# Altium PCB PCB.PcbDoc
Units mil, origin at the board's own origin, x right, y up, seen from the top; angles counter-clockwise.
Board outline 3246.78 x 2886.78 mil, 2 copper layers (Top Layer, Bottom Layer); 48 components, 38 nets, 169 pads, 30 vias.
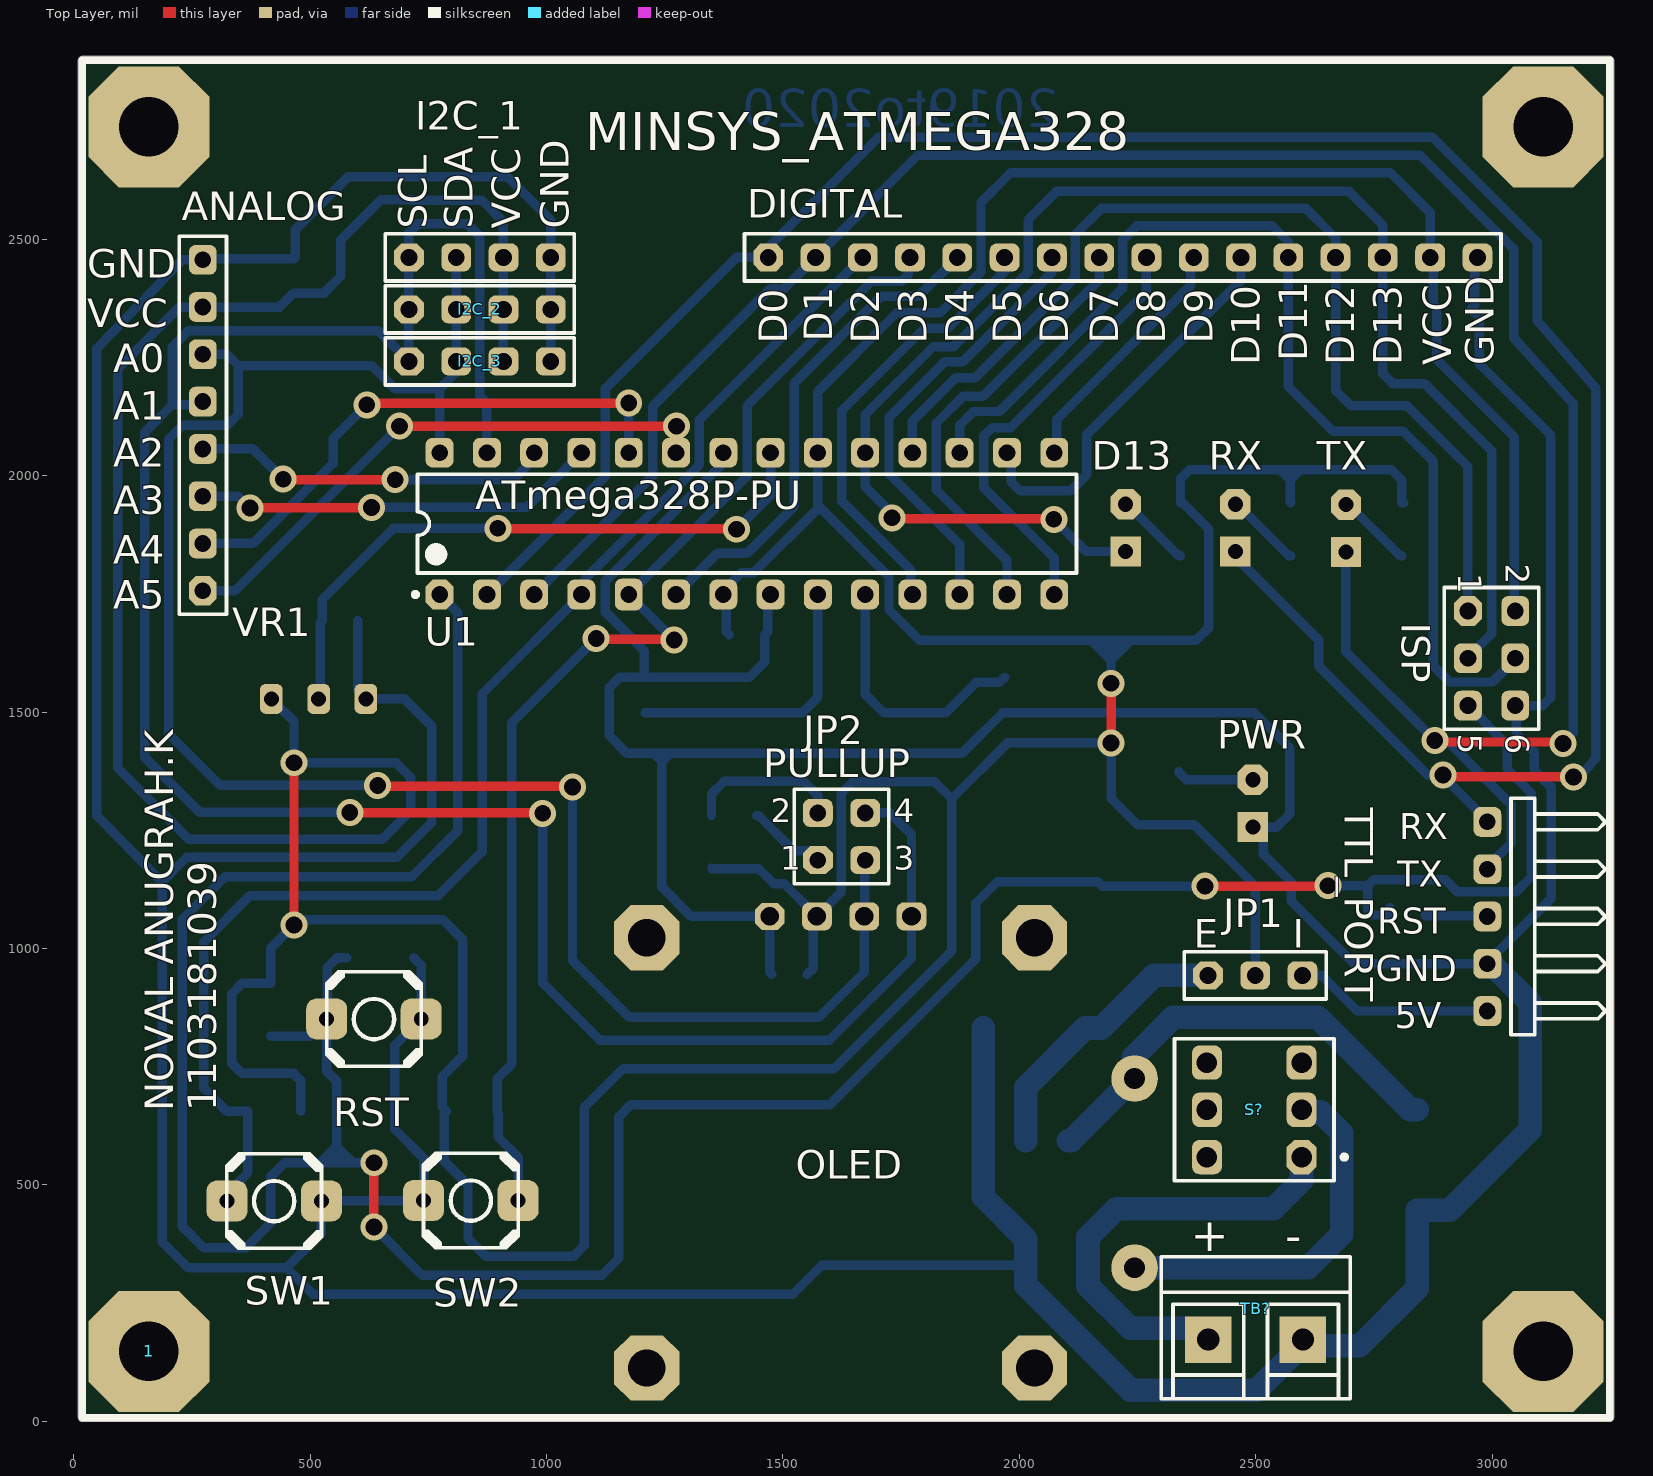
[diagram p0: Top Layer view]
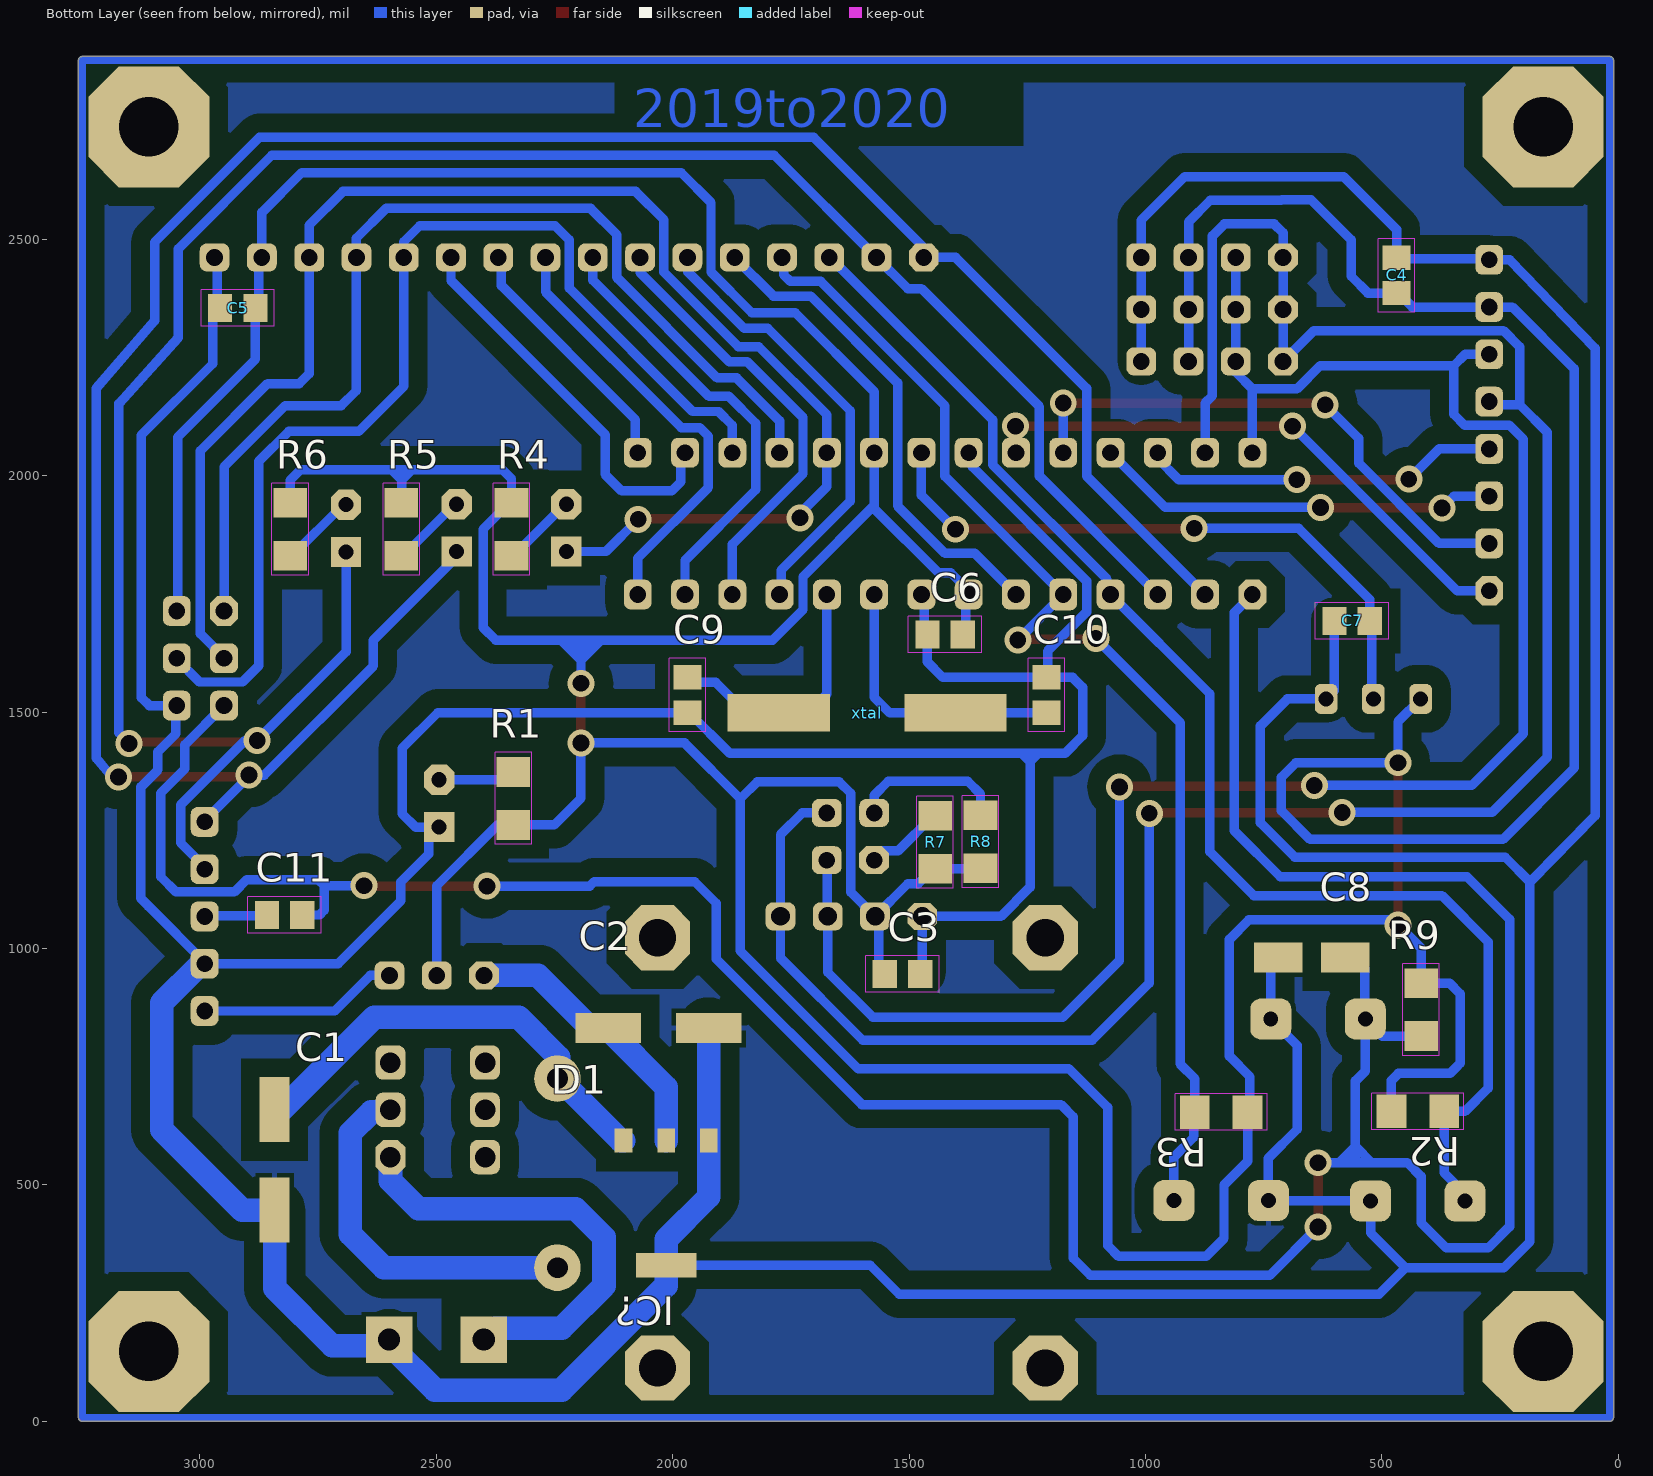
[diagram p1: Bottom Layer view, seen from below]
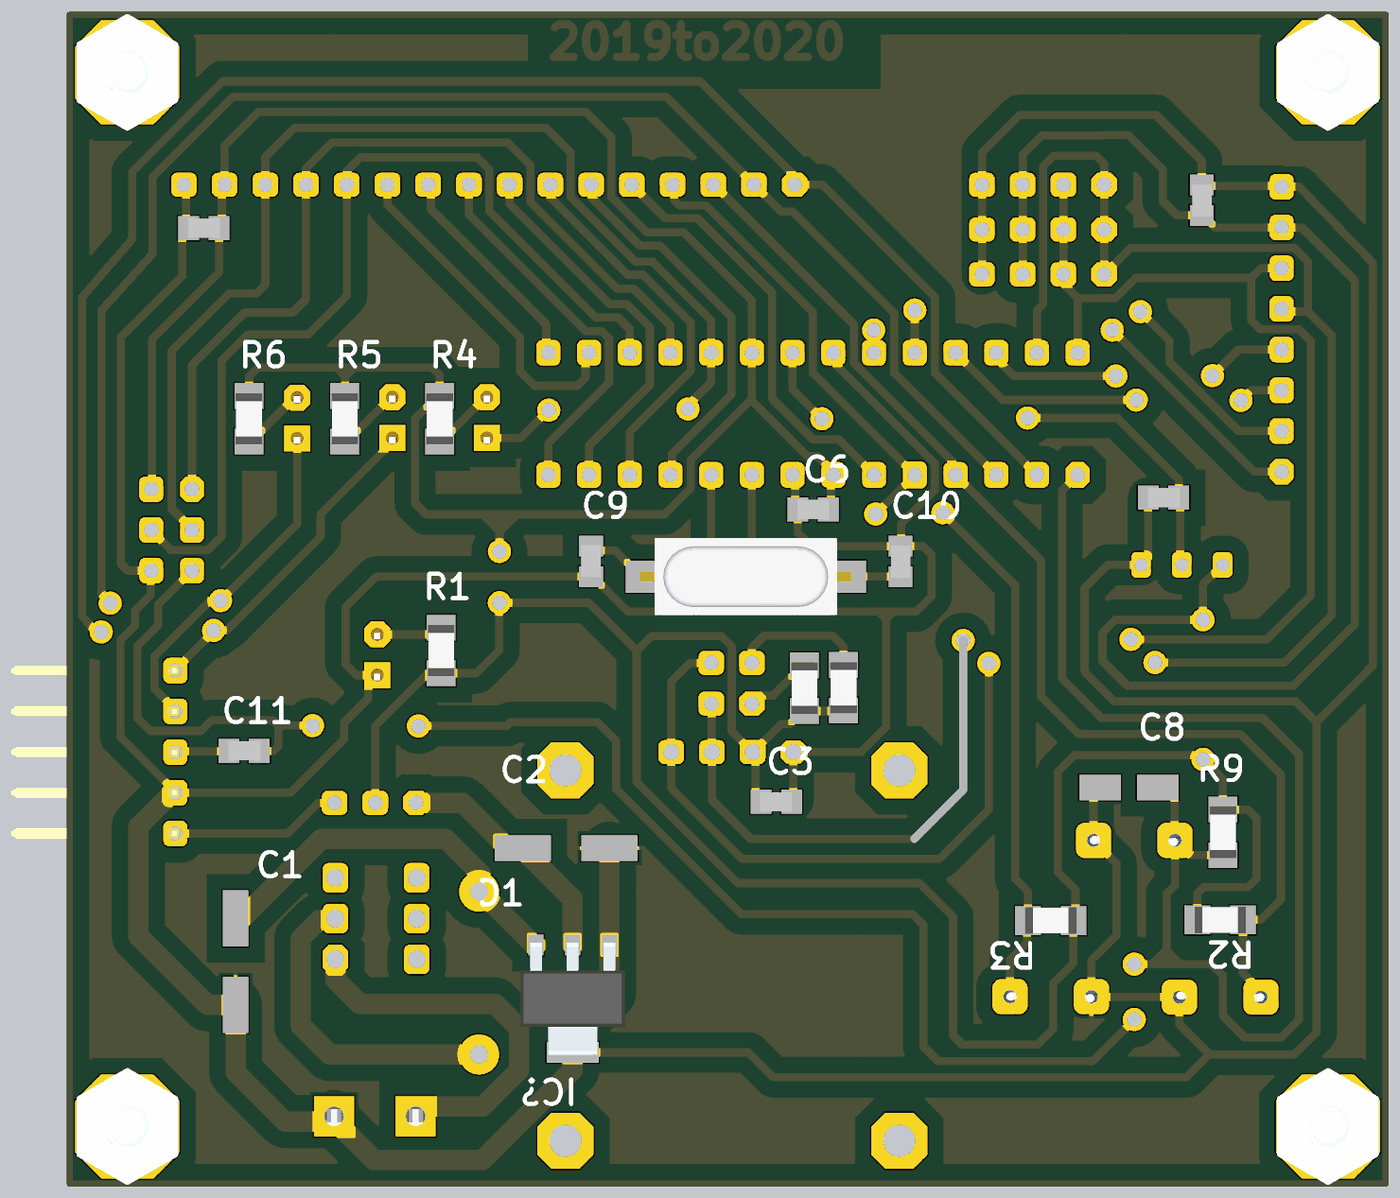
[diagram p2: 3D render of the assembled board from below, using the file's embedded part models]

## Layer stack, top to bottom
Top Solder: solder mask 0.4, Solder Resist, Dk 3.5
Top Layer: signal copper 1.4
Dielectric 1: dielectric 12.6, FR-4, Dk 4.8
Bottom Layer: signal copper 1.4
Bottom Solder: solder mask 0.4, Solder Resist, Dk 3.5

## Board outline
10.11,8 10.11,2879 cw(c18,2879) 18,2886.89 3249,2886.89 cw(c3249,2879) 3256.89,2879 3256.89,8 cw(c3249,8) 3249,0.11 18,0.11 cw(c18,8)

## Design rules (kind name [scope] priority, off if disabled: settings)
Clearance Clearance_Polygon [InPolygon] p1: gap=40 ignorepadtopadclearanceinfootprint=TRUE
Clearance [All] p2: gap=3.94 ignorepadtopadclearanceinfootprint=TRUE
PolygonConnect [All] p1: connectstyle=Relief reliefconductorwidth=10 reliefentries=4 polygonreliefangle="90 Angle" airgapwidth=10
RoutingVias [All] p1: holewidth=28 width=50 viastyle="Through Hole" minholewidth=35.43 minwidth=50 maxholewidth=118.11 maxwidth=50
SolderMaskExpansion [All] p1: expansion=4 istentingtop=FALSE
Width [All] p1: maxlimit=50 minlimit=10 preferedwidth=10 minimp=50.000000 maximp=50.000000 favimp=50.000000
30 further rules are at their usual default settings.

## Classes and differential pairs
component class SCH: ANALOG C1 C2 C3 C4 C5 C6 C7 C8 C9 C10 C11 D1 D13 DIGITAL I2C_1 I2C_2 I2C_3 IC? ISP JP1 JP2 OLED pwr R1 R2 R3 R4 R5 R6 R7 R8 R9 RST RX S? SW1 SW2 TB?

## Components (designator, comment, footprint, x,y, rotation, side; value= is the part's Value field where it differs from the comment)
1 "Spacer" SPACER 159,148 r90 top
ANALOG "Header 8" HDR1X8 273.02,1756.89 r90 top
C1 "100uF" 153CLV-0605 2842,553 r90 bottom
C2 "100uF" 153CLV-0605 2030,832 r0 bottom
C3 "100nF" C0805 1514,946 r180 bottom
C4 "100nF" C0805 469,2423.89 r90 bottom
C5 "100nF" C0805 2920,2354.89 r0 bottom
C6 "100nF" C0805 1424,1663.89 r0 bottom
C7 "100nF" C0805 563,1693 r0 bottom
C8 "10uF" 153CLV-0405 648,981 r180 bottom
C9 "22pF" C0805 1969,1536.29 r270 bottom
C10 "22pF" C0805 1209,1536.29 r90 bottom
C11 "100nF" C0805 2821,1071 r0 bottom
D1 "DIODEgeneral purpose rectifier, 1 A" DO41-10 2244,525 r270 bottom
D13 "LEDOSRAM:- CHIPLEDLG R971, LG N971, LY N971, LG Q971, LY Q971, LO R971, LY R971 LH N974, LH R974LS Q976, LO Q976, LY Q976LO Q996- Hyper CHIPLEDLW Q18SLB Q993, LB Q99A, LB R99A- SideLEDLS A670, LO A670, LY A670, LG A670, LP A670LB A673, LV A673, LT A673, LW A673LH A674LY A675LS A676, LA A676, LO A676, LY A676, LW A676LS A679, LY A679, LG A679-  Hyper Micro SIDELEDÂ®LS Y876, LA Y876, LO Y876, LY Y876LT Y87S- SmartLEDLW L88C, LW L88SLB L89C, LB L89S, LG L890LS L89K, LO L89K, LY L89KLS L896, LA L896, LO L896, LY L896- TOPLEDLS T670, LO T670, LY T670, LG T670, LP T670LSG T670, LSP T670, LSY T670, LOP T670, LYG T670LG T671, LOG T671, LSG T671LB T673, LV T673, LT T673, LW T673LH T674LS T676, LA T676, LO T676, LY T676, LB T676, LH T676, LSB T676, LW T676LB T67C, LV T67C, LT T67C, LS T67K, LO T67K, LY T67K, LW E67CLS E67B, LA E67B, LO E67B, LY E67B, LB E67C, LV E67C, LT E67CLW T67CLS T679, LY T679, LG T679LS T770, LO T770, LY T770, LG T770, LP T770LB T773, LV T773, LT T773, LW T773LH T774LS E675, LA E675, LY E675, LS T675LS T776, LA T776, LO T776, LY T776, LB T776LHGB T686LT T68C, LB T68C- Hyper Mini TOPLEDÂ®LB M676- Mini TOPLED SantanaÂ®LG M470LS M47K, LO M47K, LY M47KSource: http://www.osram.convergy.de/" LED3MM 2225,1889.89 r270 top
DIGITAL "Header 16" HDR1X16 1469,2461.89 r0 top
I2C_1 "Header 4" HDR1X4 709,2461.89 r0 top
I2C_2 "Header 4" HDR1X4 709,2351.89 r0 top
I2C_3 "Header 4" HDR1X4 709,2241.89 r0 top
IC? "AMS1117 5V" SOT229P700X180-4N 2014,462 r270 bottom
ISP "Header 3X2" HDR2X3 2949,1713.89 r270 top
JP1 "Header 3" HDR1X3 2399,943.3 r0 top
JP2 "PULLUP" HDR2X2 1574,1187 r0 top
OLED "128x64 Dot Matrix OLED Module based on SSD1306 chipVariant with I2C interfaceMore details available here:http://www.instructables.com/id/Monochrome-096-i2c-OLED-display-with-arduino-SSD13/SSD1306 datasheet:https://cdn-shop.adafruit.com/datasheets/SSD1306.pdfClick here to find device on ebay.comNote: There are two variants: I2C and SPI. Search for the proper version." DISPLAY-OLED-128X64-I2C 1622,568 r0 top
PWR "LEDOSRAM:- CHIPLEDLG R971, LG N971, LY N971, LG Q971, LY Q971, LO R971, LY R971 LH N974, LH R974LS Q976, LO Q976, LY Q976LO Q996- Hyper CHIPLEDLW Q18SLB Q993, LB Q99A, LB R99A- SideLEDLS A670, LO A670, LY A670, LG A670, LP A670LB A673, LV A673, LT A673, LW A673LH A674LY A675LS A676, LA A676, LO A676, LY A676, LW A676LS A679, LY A679, LG A679-  Hyper Micro SIDELEDÂ®LS Y876, LA Y876, LO Y876, LY Y876LT Y87S- SmartLEDLW L88C, LW L88SLB L89C, LB L89S, LG L890LS L89K, LO L89K, LY L89KLS L896, LA L896, LO L896, LY L896- TOPLEDLS T670, LO T670, LY T670, LG T670, LP T670LSG T670, LSP T670, LSY T670, LOP T670, LYG T670LG T671, LOG T671, LSG T671LB T673, LV T673, LT T673, LW T673LH T674LS T676, LA T676, LO T676, LY T676, LB T676, LH T676, LSB T676, LW T676LB T67C, LV T67C, LT T67C, LS T67K, LO T67K, LY T67K, LW E67CLS E67B, LA E67B, LO E67B, LY E67B, LB E67C, LV E67C, LT E67CLW T67CLS T679, LY T679, LG T679LS T770, LO T770, LY T770, LG T770, LP T770LB T773, LV T773, LT T773, LW T773LH T774LS E675, LA E675, LY E675, LS T675LS T776, LA T776, LO T776, LY T776, LB T776LHGB T686LT T68C, LB T68C- Hyper Mini TOPLEDÂ®LB M676- Mini TOPLED SantanaÂ®LG M470LS M47K, LO M47K, LY M47KSource: http://www.osram.convergy.de/" LED3MM 2494,1307 r270 top
R1 "331" R1206 2337,1317.57 r90 bottom
R2 "10K" R1206 424,655.7 r0 bottom
R3 "10K" R1206 840,654 r180 bottom
R4 "331" R1206 2341,1886.89 r90 bottom
R5 "1K" R1206 2574,1886.89 r90 bottom
R6 "1K" R1206 2809,1886.89 r90 bottom
R7 "10K" R1206 1445,1224.89 r270 bottom
R8 "10K" R1206 1349,1226 r270 bottom
R9 "10K" R1206 417,870.89 r90 bottom
RST "But 2Pin" PB-2Pin 635,851 r0 top
RX "LEDOSRAM:- CHIPLEDLG R971, LG N971, LY N971, LG Q971, LY Q971, LO R971, LY R971 LH N974, LH R974LS Q976, LO Q976, LY Q976LO Q996- Hyper CHIPLEDLW Q18SLB Q993, LB Q99A, LB R99A- SideLEDLS A670, LO A670, LY A670, LG A670, LP A670LB A673, LV A673, LT A673, LW A673LH A674LY A675LS A676, LA A676, LO A676, LY A676, LW A676LS A679, LY A679, LG A679-  Hyper Micro SIDELEDÂ®LS Y876, LA Y876, LO Y876, LY Y876LT Y87S- SmartLEDLW L88C, LW L88SLB L89C, LB L89S, LG L890LS L89K, LO L89K, LY L89KLS L896, LA L896, LO L896, LY L896- TOPLEDLS T670, LO T670, LY T670, LG T670, LP T670LSG T670, LSP T670, LSY T670, LOP T670, LYG T670LG T671, LOG T671, LSG T671LB T673, LV T673, LT T673, LW T673LH T674LS T676, LA T676, LO T676, LY T676, LB T676, LH T676, LSB T676, LW T676LB T67C, LV T67C, LT T67C, LS T67K, LO T67K, LY T67K, LW E67CLS E67B, LA E67B, LO E67B, LY E67B, LB E67C, LV E67C, LT E67CLW T67CLS T679, LY T679, LG T679LS T770, LO T770, LY T770, LG T770, LP T770LB T773, LV T773, LT T773, LW T773LH T774LS E675, LA E675, LY E675, LS T675LS T776, LA T776, LO T776, LY T776, LB T776LHGB T686LT T68C, LB T68C- Hyper Mini TOPLEDÂ®LB M676- Mini TOPLED SantanaÂ®LG M470LS M47K, LO M47K, LY M47KSource: http://www.osram.convergy.de/" LED3MM 2457,1889.89 r270 top
S? "SW-DPDT" DPDT-6 2497,659 r180 top
SW1 "But 2Pin" PB-2Pin 424,465.89 r180 top
SW2 "But 2Pin" PB-2Pin 840,467 r0 top
TB? "T-Blok 2Pin" TB-2P 2500,173 r0 top
TTL_PORT "Header 5H" HDR1X5H 2990,868 r90 top
TX "LEDOSRAM:- CHIPLEDLG R971, LG N971, LY N971, LG Q971, LY Q971, LO R971, LY R971 LH N974, LH R974LS Q976, LO Q976, LY Q976LO Q996- Hyper CHIPLEDLW Q18SLB Q993, LB Q99A, LB R99A- SideLEDLS A670, LO A670, LY A670, LG A670, LP A670LB A673, LV A673, LT A673, LW A673LH A674LY A675LS A676, LA A676, LO A676, LY A676, LW A676LS A679, LY A679, LG A679-  Hyper Micro SIDELEDÂ®LS Y876, LA Y876, LO Y876, LY Y876LT Y87S- SmartLEDLW L88C, LW L88SLB L89C, LB L89S, LG L890LS L89K, LO L89K, LY L89KLS L896, LA L896, LO L896, LY L896- TOPLEDLS T670, LO T670, LY T670, LG T670, LP T670LSG T670, LSP T670, LSY T670, LOP T670, LYG T670LG T671, LOG T671, LSG T671LB T673, LV T673, LT T673, LW T673LH T674LS T676, LA T676, LO T676, LY T676, LB T676, LH T676, LSB T676, LW T676LB T67C, LV T67C, LT T67C, LS T67K, LO T67K, LY T67K, LW E67CLS E67B, LA E67B, LO E67B, LY E67B, LB E67C, LV E67C, LT E67CLW T67CLS T679, LY T679, LG T679LS T770, LO T770, LY T770, LG T770, LP T770LB T773, LV T773, LT T773, LW T773LH T774LS E675, LA E675, LY E675, LS T675LS T776, LA T776, LO T776, LY T776, LB T776LHGB T686LT T68C, LB T68C- Hyper Mini TOPLEDÂ®LB M676- Mini TOPLED SantanaÂ®LG M470LS M47K, LO M47K, LY M47KSource: http://www.osram.convergy.de/" LED3MM 2691,1888.89 r270 top
U1 "ATmega328P-PU" 28P3 1424,1898.89 r90 top
VR1 "10K" S64W 518,1478 r0 top
xtal "16MHz" 9C7680MBBKT 1589,1498.89 r180 bottom
? "Spacer" SPACER 159,2738 r90 top
? "Spacer" SPACER 3108,2738 r90 top
? "Spacer" SPACER 3108,148 r90 top

## Footprints (in the part's own frame and the unit in brackets; to place one, negate y for a bottom-side part, rotate by r counter-clockwise, add the part's x,y. Pads: shape width x height; smd on the part's side, far side on the other; paste and mask are expansions set on the pad)
9C7680MBBKT [mm]
  rect 5.5x2 smd: 1(-4.75,0) 2(4.75,0)
  body extent -6.6,-2.4 6.6,2.4, height 4.3
28P3 [mm] "DIP, 28-Leads, Row Spacing 7.62mm, Pitch 2.54mm, Body 34.67x7.3mm"
  oct 1.6x1.5 hole 0.9: 1(-3.81,16.51)
  rrect50% 1.6x1.5 hole 0.9: 2(-3.81,13.97) 3(-3.81,11.43) 4(-3.81,8.89) 6(-3.81,3.81) 7(-3.81,1.27) 8(-3.81,-1.27) 9(-3.81,-3.81) 10(-3.81,-6.35) 11(-3.81,-8.89) 12(-3.81,-11.43) 13(-3.81,-13.97) 14(-3.81,-16.51) 15(3.81,-16.51) 16(3.81,-13.97) 17(3.81,-11.43) 18(3.81,-8.89) 19(3.81,-6.35) 20(3.81,-3.81) 21(3.81,-1.27) 22(3.81,1.27) 23(3.81,3.81) 24(3.81,6.35) 25(3.81,8.89) 26(3.81,11.43) 27(3.81,13.97) 28(3.81,16.51)
  rrect50% 1.7x1.5 hole 0.9: 5(-3.81,6.35)
  silkscreen extent -3.93,-17.7 2.65,17.93, body extent -3.6,-17.65 3.6,17.65, height 4.58
153CLV-0405 [mil]
  rect 102.36x62.99 smd: +(70.87,0) -(-70.87,0)
153CLV-0605 [mm]
  rect 3.5x1.6 smd: +(2.7,0) -(-2.7,0)
C0805 [mil]
  rect 51.18x59.06 smd: 1(-37.4,0) 2(37.4,0)
  Top Layer keep-out lines w2: 77.68,-38.7 -77.68,-38.7 -77.68,38.7 77.68,38.7 77.68,-38.7
  body extent -40,-25 39,24, height 49
DISPLAY-OLED-128X64-I2C [mm]
  oct 1.6x1.452 hole 1: 1(-3.81,12.7)
  rrect50% 1.6x1.5 hole 1: 2(-1.27,12.7) 3(1.27,12.7) 4(3.81,12.7)
  oct 3.5x3.5 hole 2 unplated: MH1(-10.414,11.557) MH2(10.414,11.557) MH3(10.414,-11.557) MH4(-10.414,-11.557)
DO41-10 [mm]
  round 2.5 hole 1.118: A(5.08,0) C(-5.08,0)
DPDT-6 [mm] "Switch; 6 Leads"
  oct 1.6x1.85 hole 1.1: 1(-2.54,2.54)
  rrect50% 1.6x1.85 hole 1.1: 2(-2.54,0) 3(-2.54,-2.54) 4(2.54,-2.54) 5(2.54,0) 6(2.54,2.54)
  silkscreen extent -4.96,-3.81 4.28,3.81
HDR1X3 [mm] "Connector; Header; 3 Position"
  oct 1.6x1.5 hole 0.9: 1(0,0)
  rrect50% 1.6x1.5 hole 0.9: 2(2.54,0) 3(5.08,0)
  silkscreen extent -1.27,-1.27 6.35,1.27
HDR1X4 [mm] "Connector; Header; 4 Position"
  oct 1.6x1.5 hole 0.9: 1(0,0)
  rrect50% 1.6x1.5 hole 0.9: 2(2.54,0) 3(5.08,0) 4(7.62,0)
  silkscreen extent -1.27,-1.27 8.89,1.27
HDR1X5H [mm] "Connector; Header; 5 Position; Right Angle"
  rrect50% 1.6x1.5 hole 0.9: 1(0,0) 2(2.54,0) 3(5.08,0) 4(7.62,0) 5(10.16,0)
  silkscreen extent -1.27,-6.35 11.43,-1.27, body extent -1.27,-10.23 11.43,0.25, height 3.13
HDR1X8 [mm] "Connector; Header; 8 Position"
  oct 1.6x1.5 hole 0.9: 1(0,0)
  rrect50% 1.6x1.5 hole 0.9: 2(2.54,0) 3(5.08,0) 4(7.62,0) 5(10.16,0) 6(12.7,0) 7(15.24,0) 8(17.78,0)
  silkscreen extent -1.27,-1.27 19.05,1.27
HDR1X16 [mm] "Connector; Header; 16 Position"
  oct 1.6x1.5 hole 0.9: 1(0,0)
  rrect50% 1.6x1.5 hole 0.9: 2(2.54,0) 3(5.08,0) 4(7.62,0) 5(10.16,0) 6(12.7,0) 7(15.24,0) 8(17.78,0) 9(20.32,0) 10(22.86,0) 11(25.4,0) 12(27.94,0) 13(30.48,0) 14(33.02,0) 15(35.56,0) 16(38.1,0)
  silkscreen extent -1.27,-1.27 39.37,1.27
HDR2X2 [mm] "Connector; Header; 2x2 Position"
  oct 1.6x1.5 hole 0.9: 1(0,0)
  rrect50% 1.6x1.5 hole 0.9: 2(0,2.54) 3(2.54,0) 4(2.54,2.54)
  silkscreen extent -1.27,-1.27 3.81,3.81
HDR2X3 [mm] "Connector; Header; 3x2 Position"
  oct 1.6x1.5 hole 0.9: 1(0,0)
  rrect50% 1.6x1.5 hole 0.9: 2(0,2.54) 3(2.54,0) 4(2.54,2.54) 5(5.08,0) 6(5.08,2.54)
  silkscreen extent -1.27,-1.27 6.35,3.81
LED3MM [mil]
  oct 63.9x63.9 / inner oct 60x60 / far side oct 63.9x63.9 hole 32: A(-50,0)
  rect 63.9x63.9 / inner rect 60x60 / far side rect 63.9x63.9 hole 32: K(50,0)
  body extent -70,-75 65,75, height 205
PB-2Pin [mm]
  rrect50% 2.2x2.2 hole 0.8: 1(-2.54,0) 2(2.54,0)
  silkscreen extent -2.54,-2.54 2.54,2.54, body extent -3.61,-3.56 3.64,3.48, height 4.33
R1206 [mil]
  rect 62.99x70.98 smd: 1(-55.98,0) 2(55.98,0)
  Top Layer keep-out lines w2: -97.36,-38.7 97.36,-38.7 97.36,38.7 -97.36,38.7 -97.36,-38.7
  body extent -63,-33 63,33, height 21
S64W [mil]
  rrect50% 48x62.99 hole 32: A(100,50) E(-100,50) S(0,50)
SOT229P700X180-4N [mm]
  rect 1.3x0.95 smd: 1(-3.35,2.29) 2(-3.35,0) 3(-3.35,-2.29)
  rect 1.3x3.25 smd: 4(3.35,0)
  body extent -3.5,-3.25 3.5,3.25, height 1.8
SPACER [mm]
  oct 6.5x6.5 hole 3.2: 1(0,0)
  body extent -3.65,-3.17 3.65,3.18, height 2.45
TB-2P [mm]
  rect 2.5x2.5 hole 1.2: 1(-2.54,0) 2(2.54,0)
  round 1 on Top Overlay: ""(-2.54,3.302) ""(2.54,3.302)
  silkscreen extent -5.08,-3.17 5.08,4.44, body extent -5.08,-3.14 5.08,4.36, height 10.03

## Part data
ANALOG: "Header, 8-Pin", LatestRevisionDate=17-Jul-2002, LatestRevisionNote="Re-released for DXP Platform.", Publisher="Altium Limited"
C1 C2: library part CPOL-EU153CLV-0605, Package=153CLV-0605, DeviceName=153CLV-0605, DeviceSetName=CPOL-EU, GateName_1=G$1, LibraryName=rcl, SymbolName_1=CPOL
C3 C4 C5 C6 C7 C9 C10 C11: library part C-EUC0805, Package=C0805, DeviceName=C0805, DeviceSetName=C-EU, GateName_1=G$1, LibraryName=rcl, SymbolName_1=C-EU
C8: library part CPOL-EU153CLV-0405, Package=153CLV-0405, DeviceName=153CLV-0405, DeviceSetName=CPOL-EU, GateName_1=G$1, LibraryName=rcl, SymbolName_1=CPOL
D1: library part 1N4004, Package=DO41-10, DeviceSetName=1N4004, GateName_1=1, LibraryName=diode, SymbolName_1=D
D13 PWR RX TX: library part LED3MM, DeviceName=3MM, DeviceSetName=LED, GateName_1=G$1, LibraryName=led, Package=LED3MM, SymbolName_1=LED
DIGITAL: "Header, 16-Pin", LatestRevisionDate=17-Jul-2002, LatestRevisionNote="Re-released for DXP Platform.", Publisher="Altium Limited"
I2C_1 I2C_2 I2C_3: "Header, 4-Pin", LatestRevisionDate=17-Jul-2002, LatestRevisionNote="Re-released for DXP Platform.", Publisher="Altium Limited"
IC?: library part AMS1117-3.3V, Manufacturer_Name="Advanced Monolithic Systems", Manufacturer_Part_Number=ams1117-3.3v, Package=SOT229P700X180-4N, DeviceSetName=AMS1117-3.3V, GateName_1=G$1, Height=1.8mm, LibraryName=ams1117-3.3v, SymbolName_1=AMS1117-3.3V
ISP: "Header, 3-Pin, Dual row", LatestRevisionDate=17-Jul-2002, LatestRevisionNote="Re-released for DXP Platform.", Publisher="Altium Limited"
JP1: "Header, 3-Pin", LatestRevisionDate=17-Jul-2002, LatestRevisionNote="Re-released for DXP Platform.", Publisher="Altium Limited"
JP2: library part "Header 2X2", "Header, 2-Pin, Dual row", LatestRevisionDate=17-Jul-2002, LatestRevisionNote="Re-released for DXP Platform.", Publisher="Altium Limited"
OLED: library part DISPLAY-OLED-128X64-I2C, DeviceSetName=DISPLAY-OLED-128X64-I2C, GateName_1=G$1, LibraryName=MASTER, Package=DISPLAY-OLED-128X64-I2C, SymbolName_1=DISPLAY-OLED-128X64-I2C
R1 R2 R3 R4 R5 R6 R7 R8 R9: library part R-EU_R1206, Package=R1206, DeviceName=R1206, DeviceSetName=R-EU_, GateName_1=G$1, LibraryName=rcl, SymbolName_1=R-EU
RST SW1 SW2: "Push Button 2Pin"
S?: "Double-Pole, Double-Throw Switch", LatestRevisionDate=17-Jul-2002, LatestRevisionNote="Re-released for DXP Platform.", PackageDescription="Switch; 6 Leads", PackageReference=DPDT-6, Published=24-Mar-1999, Publisher="Altium Limited"
TB?: "Terminal Blok 2Pin"
TTL_PORT: "Header, 5-Pin, Right Angle", LatestRevisionDate=17-Jul-2002, LatestRevisionNote="Re-released for DXP Platform.", Publisher="Altium Limited"
U1: "8-bit AVR Microcontroller, 32KB Flash, 1KB EEPROM, 2KB SRAM, 28-pin PDIP, Industrial Grade (-40°C to 85°C)", Supplier Part Number 1=ATMEGA328P-PU-ND, ComponentLink1Description="Manufacturer Link", ComponentLink1URL=http://www.atmel.com/products/avr/default.asp?, ComponentLink2Description="ATmega48A/48PA/88A/88PA/168A/168PA/328/328P Datasheet", ComponentLink2URL=http://www.atmel.com/dyn/resources/prod_documents/8271.pdf, ComponentLink3Description="ATmega48A/48PA/88A/88PA/168A/168PA/328/328P Summary", ComponentLink3URL=http://www.atmel.com/dyn/resources/prod_documents/8271S.pdf, ComponentLink4Description="Atmel.com Home", ComponentLink4URL=http://www.atmel.com, DatasheetVersion="revA, Jan-2010", PackageDescription="28-lead (0.300\"/7.62mm Wide) Plastic Dual Inline Package (PDIP)", PackageReference=28P3, PackageVersion="revB, Sep-2001", Published=1-Apr-2010, Publisher="Altium Limited", Supplier 1=Digi-Key, Supplier 2=Farnell, Supplier 3=Mouser, Supplier Part Number 2=1715487, Supplier Part Number 3=556-ATMEGA328P-PU
VR1: library part TRIM_EU-S64W, Package=S64W, DeviceName=S64W, DeviceSetName=TRIM_EU-, GateName_1=1, LibraryName=pot, SymbolName_1=TPOT
xtal: library part 9C-8.000MEEJ-T, Manufacturer_Name=TXC, Package=9C7680MBBKT, DeviceSetName=9C-8.000MEEJ-T, GateName_1=G$1, Height=3.8mm, LibraryName=9C-8.000MEEJ-T, Manufacturer_Part_Number=9C-8.000MEEJ-T, Mouser_Part_Number=717-9C-8.000MEEJ-T, Mouser_Price-Stock=https://www.mouser.com/Search/Refine.aspx?Keyword=717-9C-8.000MEEJ-T, SymbolName_1=9C-8.000MEEJ-T

## Via types
v1: diameter 57, hole 35.43, Top Layer to Bottom Layer, 30 vias

## Nets (pads, with @x,y where several pads share a name; then routed paths per layer and width w, separated by ;. In a path a pad name is that pad's centre, name@x,y a point inside that pad or via, vN(x,y) a via of type N, cw(c..) or ccw(c..) an arc to the next point about the centre after c; other vN are vias at no path point)
+5: JP1.3 TTL_PORT.1 | length 422.2
  Bottom Layer w20: JP1.3 2639.7,943.3 2715,868 TTL_PORT.1
GND: ANALOG.8 C1.- C2.- C3.2 C4.2 C5.2 C6.2 C7.2 C8.- C9.2 C10.2 DIGITAL.16 I2C_1.4 I2C_2.4 I2C_3.4 IC?.1 IC?.4 ISP.6 OLED.1 PWR.K RST.2 SW1.1 SW2.1 TB?.2 TTL_PORT.2 U1.8 U1.22 VR1.A | length 15925
  Bottom Layer w10: IC?.4@1988.44,330.11 2013.41,330.11 IC?.4 ; TTL_PORT.2@2987.89,968.89 2989.11,968.89 TTL_PORT.2
  Bottom Layer w20: ANALOG.8 229.89,2456.89 49,2270 49,1281 187,1141 ; ANALOG.8@275,2456.89 277.2,2459.09 466.8,2459.09 C4.2 469,2520.89 581,2632.89 917,2632.89 1009,2540.89 I2C_1.4 I2C_2.4 I2C_3.4 ; C7.2 600.4,1545.6 VR1.A 700,1528 757,1471 757,1266 684,1193 239,1193 187,1141 ; C8.- 735,964.87 RST.2 679,795 679,618 740,557 SW2.1 739.44,466.44 524.56,466.44 SW1.1 524,399 450,325 ; U1.22 1366.53,2041.42 1366.53,2019.53 1124.47,1777.47 1124.47,1711.84 1207.03,1629.28 1207.03,1575.66 C10.2 ; U1.8 1467.7,1742.59 1467.7,1670.19 C6.2 1462,1663.29 1462,1607 1428.69,1573.69 C10.2 ; C3.2 1472,950.6 OLED.1 1306,1068 1244,1130 1244,1395.59 ; IC?.4@1988.44,330.11 1582.11,330.11 1520.9,268.9 506.1,268.9 450,325 ; DIGITAL.16 2963.2,2456.09 2963.2,2360.69 C5.2 2957.4,2350.95 2972.99,2335.36 2972.99,2237.01 3124,2086 3124,1530.89 3107,1513.89 ISP.6 3050.95,1511.93 3050.95,1454.36 3089,1416.32 3089,1378 3125,1342 3125,1106 3109,1090 TTL_PORT.2@2987.89,968.89 ; TTL_PORT.2 2707.88,968 2575.13,1100.75 2575.13,1140.83 2515.95,1200.01 2515.95,1235.05 PWR.K 2544,1257 2572,1285 2572,1424 2497.11,1498.89 C9.2 1965.06,1498.89 1879.76,1413.59 1262,1413.59 1244,1395.59 ; 187,1141 187,380 242,325 450,325 ; C10.2 1154.24,1573.69 1133,1552.45 1133,1450 1169.41,1413.59 1226,1413.59 1244,1395.59
  Bottom Layer w50: C2.- 1923.77,831.93 1923.77,593.96 IC?.1 1923.84,475.16 2014,385 2014,330.7 IC?.4@2013.41,330.11 ; IC?.4 2014,287 2235,66 2503,66 2597,160 TB?.2@2613,160 ; TB?.2 TB?.2@2613,160 ; TTL_PORT.2@2991.73,964.71 3001.29,964.71 3081,885 3081,617 2910.7,446.7 C1.- 2842,281.79 2720.21,160 TB?.2@2613,160
NetANALOG_1: ANALOG.1 U1.23 | length 1210
  Top Layer w20: v1(689,2104.89) v1(1275,2104.89)
  Bottom Layer w20: ANALOG.1 341,1756.89 v1(689,2104.89) ; U1.23 1284,2058.89 1275,2067.89 v1(1275,2104.89)
NetANALOG_2: ANALOG.2 U1.24 | length 1157.5
  Top Layer w20: v1(620,2150) 623.89,2153.89 v1(1174,2153.89)
  Bottom Layer w20: ANALOG.2@275,1856.89 378.89,1856.89 549,2027 549,2079 v1(620,2150) ; U1.24 v1(1174,2153.89)
NetANALOG_3: ANALOG.3 U1.25 | length 859.7
  Top Layer w20: v1(373,1932) 629,1932 v1(630,1933)
  Bottom Layer w20: ANALOG.3 348.11,1956.89 v1(373,1932) ; v1(630,1933) 958.11,1933 U1.25
NetANALOG_4: ANALOG.4 U1.26 | length 759.1
  Top Layer w20: v1(443,1992.89) 444,1991.89 v1(680,1991.89)
  Bottom Layer w20: ANALOG.4 379,2056.89 v1(443,1992.89) ; v1(680,1991.89) 930,1991.89 974,2035.89 U1.26
NetANALOG_5: ANALOG.5 I2C_1.1 I2C_2.1 I2C_3.1 JP2.4 OLED.4 U1.27 | length 4936.1
  Top Layer w20: v1(584,1288) 585,1287 991,1287 v1(992,1286)
  Bottom Layer w20: ANALOG.5 266.51,2150.38 208.49,2150.38 ; v1(584,1288) 267,1288 150,1405 150,2091.89 208.49,2150.38 ; U1.27 874,2153.85 858.53,2169.32 858.53,2507.36 833,2532.89 728,2532.89 709,2513.89 I2C_1.1 I2C_2.1 I2C_3.1 643.89,2307 243,2307 208.49,2272.49 208.49,2150.38 ; v1(992,1286) 992,927 1113,806 1598,806 1772,980 OLED.4 1772,1241 1726,1287 JP2.4
NetANALOG_6: ANALOG.6 I2C_1.2 I2C_2.2 I2C_3.2 JP2.3 OLED.3 U1.28 | length 4065.4
  Top Layer w20: v1(643,1345) 644.5,1343.5 1053.5,1343.5 v1(1055,1342)
  Bottom Layer w20: ANALOG.6 324,2256.89 348,2232.89 ; v1(643,1345) 310,1345 201,1454 201,2077.56 230.44,2107 325,2107 348,2130 348,2232.89 ; U1.28 774,2183.89 ; I2C_1.2 I2C_2.2 I2C_3.2 809,2218.89 774,2183.89 ; v1(1055,1342) 1055,974.62 1174.67,854.95 1576.95,854.95 1672,950 OLED.3 1673,1069 1673,1186 JP2.3 ; 348,2232.89 630.66,2232.89 679.66,2183.89 774,2183.89
NetC1_+: C1.+ D1.C IC?.3 | length 953.4
  Bottom Layer w50: IC?.3 2109.87,593.89 2240.98,725 2240.98,769.98 2326,855 2631,855 2826.7,659.3 C1.+
NetC2_+: C2.+ IC?.2 JP1.1 | length 595.8
  Bottom Layer w50: IC?.2 2014,706.63 2139.37,832 2173.7,832 2285,943.3 JP1.1
NetC7_1: C7.1 U1.21 VR1.S | length 1344.9
  Top Layer w20: v1(897,1888.89) 898,1887.89 1401,1887.89 v1(1402,1886.89)
  Bottom Layer w20: VR1.S 521.8,1531.8 521.8,1689.2 C7.1 525.6,1738.38 676.11,1888.89 v1(897,1888.89) ; v1(1402,1886.89) 1474,1958.89 U1.21
NetC8_+: C8.+ C11.1 ISP.5 R9.1 RST.1 U1.1 | length 6771.8
  Top Layer w20: v1(635,411) v1(635,547) ; v1(2393,1132) 2652,1132 v1(2653,1133)
  Bottom Layer w20: R9.1 498.91,814.91 RST.1 ; C8.+ 557.45,981 535.95,959.5 535.95,857.95 538.95,854.95 RST.1 ; v1@634,554.03 v1@638.02,550.02 ; v1(635,411) 737,309 1117,309 1153,345 1153,644 1179,670 1600,670 1908,978 1908,1096 1953.27,1141.27 2166.41,1141.27 2175.68,1132 v1(2393,1132) ; v1(635,547) 590.43,547 556,581.43 ; U1.1 812,1710.89 812,1249 715,1152 320,1152 230,1062 230,412 275,367 364,367 417,420 417,518 446,547 521.57,547 556,581.43 ; v1(2653,1133) 2737,1133 ; C11.1@2783.6,1086.4 C11.1 2747.31,1071 2737,1081.31 2737,1133 ; ISP.5 3032,1430.89 3032,1380 3083,1329 3083,1152.05 3050.95,1120 2927,1120 2901,1146 2750,1146 2737,1133 ; RST.1 535,741 556,720 556,581.43
NetC9_1: C9.1 U1.10 xtal.1 | length 552.9
  Bottom Layer w20: U1.10 1674,1538.26 1713.37,1498.89 1844.91,1498.89 1909.47,1563.45 1958.76,1563.45 C9.1
NetC10_1: C10.1 U1.9 xtal.2 | length 595.9
  Bottom Layer w20: C10.1 xtal.2 1541.32,1498.89 1574,1531.57 U1.9
NetC11_2: C11.2 TTL_PORT.3 | length 132.8
  Bottom Layer w20: C11.2 2859.9,1069.5 2988.5,1069.5 TTL_PORT.3
NetD1_A: D1.A S?.2 | length 786.7
  Bottom Layer w50: D1.A 2611,325 2682,396 2682,610 2637.37,654.63 2601.37,654.63 S?.2
NetD13_A: D13.A R4.1 | length 161.1
  Bottom Layer w20: D13.A 2228.02,1939.89 2337,1830.91 R4.1
NetD13_K: D13.K DIGITAL.14 ISP.3 U1.19 | length 3221.7
  Top Layer w20: v1(1731,1911) 1732.5,1909.5 2071.5,1909.5 v1(2073,1908)
  Bottom Layer w20: v1(1731,1911) 1731,1920.01 1674,1977.01 U1.19 1674,2129 1818,2273 1861,2273 2019,2431 2019,2542 2078.43,2601.43 2697.57,2601.43 2769,2530 DIGITAL.14 2769,2216 2790,2195 2857,2195 2999,2053 2999,1665.86 2949,1615.86 ISP.3 ; v1(2073,1908) 2141.11,1839.89 D13.K
NetDIGITAL_1: DIGITAL.1 RX.K TTL_PORT.5 U1.2 | length 5143.1
  Top Layer w20: v1(2896,1366.89) 2899.89,1363 v1(3172,1363)
  Bottom Layer w20: U1.2 1124.47,1999.36 1124.47,2184.7 1401.66,2461.89 DIGITAL.1 1469,2482.89 1702.11,2716 2874,2716 3096,2494 3096,2328.21 3219,2185.01 3219,1403 3186,1363 v1(3172,1363) ; RX.K 2445.5,1839.89 2633,1652.39 2633,1597.89 2864,1366.89 v1(2896,1366.89) 2896,1364.44 2990,1270.44 TTL_PORT.5
NetDIGITAL_2: DIGITAL.2 TTL_PORT.4 TX.K U1.3 | length 4853.6
  Top Layer w20: v1(2879,1440) 2882.06,1436.94 3146.94,1436.94 v1(3150,1433.89)
  Bottom Layer w20: U1.3 1224.47,1999.36 1224.47,2146.47 1473.89,2395.89 1503,2395.89 DIGITAL.2 1785.11,2678 2848,2678 3046,2480 3046,2292.37 3171.43,2152.88 3171.43,1456.32 v1(3150,1433.89) ; TX.K 2691,1628 v1(2879,1440) 2905,1440 3041,1304 3041,1223.93 2990,1172.93 TTL_PORT.4
NetDIGITAL_3: DIGITAL.3 R2.1 SW1.2 U1.4 | length 2900.9
  Bottom Layer w20: SW1.2 324,481.52 368.02,525.54 R2.1 324.3,655.7 275,705 275,1013.89 373.11,1112 771,1112 864,1205 864,1538.89 U1.4 1081.47,1756.36 1081.47,1781.47 1323.53,2023.53 1323.53,2118.39 1667.03,2461.89 DIGITAL.3 DIGITAL.3@1669,2451
NetDIGITAL_4: DIGITAL.4 R3.1 SW2.2 U1.5 | length 2610.7
  Top Layer w20: v1(1105,1655.89) 1106.5,1654.39 1268.5,1654.39 v1(1270,1652.89)
  Bottom Layer w20: SW2.2 940,559 898,601 898,651.98 R3.1 895.98,724.98 927,756 927,1477.89 v1(1105,1655.89) ; v1(1270,1652.89) U1.5 1424.47,1999.36 1424.47,2148.47 1687,2411 1751,2411 1765,2425 1765,2457.89 DIGITAL.4 DIGITAL.4@1751,2461.89
NetDIGITAL_5: DIGITAL.5 U1.6 | length 1042.7
  Bottom Layer w20: U1.6 1361,1835.89 1424,1835.89 1524.47,1936.36 1524.47,2196.47 1708,2380 1787.11,2380 DIGITAL.5
NetDIGITAL_6: DIGITAL.6 U1.11 | length 946.9
  Bottom Layer w20: U1.11 1770.83,1752.06 1770.83,1800.17 1624.47,1946.53 1624.47,2137.47 1799,2312 1849,2312 1968,2431 1968,2460.89 DIGITAL.6
NetDIGITAL_7: DIGITAL.7 U1.12 | length 939.9
  Bottom Layer w20: U1.12 1874,1854.89 1724.47,2004.42 1724.47,2123.47 1842,2241 1880,2241 2069,2430 DIGITAL.7
NetDIGITAL_8: DIGITAL.8 U1.13 | length 942.1
  Bottom Layer w20: U1.13 1974,1820.89 1824.47,1970.42 1824.47,2111.22 1881.26,2168 1923,2168 2169,2414 DIGITAL.8
NetDIGITAL_9: DIGITAL.9 U1.14 | length 940.5
  Bottom Layer w20: U1.14 2074,1825.89 1924.47,1975.42 1924.47,2083.47 1943,2102 1982,2102 2269,2389 DIGITAL.9
NetDIGITAL_10: DIGITAL.10 U1.15 | length 535.2
  Bottom Layer w20: U1.15 2079.1,2053.98 2079.1,2118.98 2362.47,2402.36 2362.47,2455.36 DIGITAL.10
NetDIGITAL_11: DIGITAL.11 U1.16 | length 851
  Bottom Layer w20: U1.16@1980.43,2055.31 U1.16 1982.61,2040.28 1982.61,1987.39 2002,1968 2108,1968 2143,2003 2143,2087 2469,2413 DIGITAL.11
NetDIGITAL_12: DIGITAL.12 ISP.4 U1.17 | length 2321.8
  Bottom Layer w20: U1.17 1874,2107 1903,2136 1958,2136 2219,2397 2219,2499 2249,2529 2535,2529 2569,2495 DIGITAL.12 2569,2189 2664,2094 2812.22,2094 2876,2030.22 2876,1597.89 2910,1563.89 3000.97,1563.89 3049,1611.92 ISP.4
NetDIGITAL_13: DIGITAL.13 ISP.1 U1.18 | length 2201.8
  Bottom Layer w20: U1.18 1774,2116 1865,2207 1906,2207 2116,2417 2116,2418 2118,2420 2118,2510 2173.66,2565.66 2606.34,2565.66 2669.5,2502.5 ; 2669,2502 DIGITAL.13 2669.5,2461.39 2669.5,2180 2701.5,2148 2819.98,2148 2949,2018.98 ISP.1
NetJP2_1: JP2.1 R7.1 | length 167.9
  Bottom Layer w20: R7.1 1448.99,1280.87 1523.34,1206.53 1554.47,1206.53 JP2.1
NetJP2_2: JP2.2 R8.1 | length 330.6
  Bottom Layer w20: R8.1 1349,1327 1376,1354 1544,1354 1574,1324 JP2.2
Netpwr_A: PWR.A R1.2 | length 163.9
  Bottom Layer w20: R1.2 2353.56,1357 PWR.A
NetR5_1: R5.1 RX.A | length 162.1
  Bottom Layer w20: RX.A 2461.02,1939.89 2570,1830.91 R5.1
NetR6_1: R6.1 TX.A | length 162.7
  Bottom Layer w20: TX.A 2697.02,1938.89 2805,1830.91 R6.1
NetS?_1: S?.1 TB?.1 | length 955.6
  Bottom Layer w50: TB?.1 2375.79,197.21 2234.79,197.21 2145.4,286.6 2145.4,389.4 2205.64,449.64 2537.64,449.64 2597,509 S?.1
VCC: ANALOG.7 C3.1 C4.1 C5.1 C6.1 DIGITAL.15 I2C_1.3 I2C_2.3 I2C_3.3 ISP.2 JP1.2 OLED.2 R1.1 R2.2 R3.2 R4.2 R5.2 R6.2 R7.2 R8.2 R9.2 U1.7 U1.20 VR1.E | length 14467.2
  Top Layer w20: v1(466,1050) v1(466,1393) ; v1(2194,1561) 2194.11,1560.89 v1(2194.11,1434.89)
  Bottom Layer w20: VR1.E 466,1480 v1(466,1393) 682,1393 713,1362 713,1292 652,1231 244,1231 93,1382 93,2226 223.89,2356.89 ANALOG.7 435.46,2356.89 465.06,2386.49 C4.1 529.6,2386.49 565,2421.89 565,2498.89 650,2583.89 712,2583.89 713,2582.89 863,2582.89 909,2536.89 I2C_1.3 I2C_2.3 I2C_3.3 ; R2.2 479.98,721.02 465,736 356,736 342.24,749.76 334.51,757.49 334.51,904.51 356.87,926.87 R9.2 417,1001 v1(466,1050) 469,1050 479.53,1060.53 781.47,1060.53 822.61,1019.39 822.61,772.52 779.08,729 779.08,665.28 R3.2@788.02,656.34 ; R3.2 784.02,549.98 834,500 834,387 872,349 1057,349 1080,372 1080,664 1161.89,745.89 1607.89,745.89 1857,995 1857,1316.89 ; R8.2 1350.11,1168.91 R7.2 1448.99,1168.91 1480.9,1137 1503,1137 OLED.2 ; C6.1 1380.3,1670.19 1380.3,1742.59 U1.7 1374,1756.89 1412,1794.89 1437.89,1794.89 1574,1931 1574,1937 ; C3.1 1564.53,959.13 1564.53,1060.53 OLED.2 ; v1(2194,1561) 2194,1610 ; JP1.2 2499,1133 2370.41,1261.59 R1.1 2250.41,1261.59 2194.11,1317.89 v1(2194.11,1434.89) 1975,1434.89 1857,1316.89 ; R5.2 2573,1943.87 2573,1990.89 ; R6.2@2812.99,1942.87 R6.2 2809,1990.89 2787,2012.89 2595,2012.89 2573,1990.89 ; ISP.2 3047,1715.89 3047,2082 2882.6,2246.4 C5.1 2875.8,2361.69 2875.8,2455.09 DIGITAL.15 2869,2557 2785,2641 1982.1,2641 1919,2577.9 1919,2431 1833,2345 1741,2345 1574,2178 U1.20 1574,1937 ; OLED.2 1623.53,1119.53 1623.53,1328.53 1648,1353 1820.89,1353 1857,1316.89 ; 1574,1937 1724.47,1786.53 1724.47,1716.53 1788.94,1652.06 2151.94,1652.06 2194,1610 ; 2194,1610 2236,1652 2374,1652 2401,1679 2401,1886.86 2344.99,1942.87 R4.2 2341,1993.89 2360,2012.89 2551,2012.89 2573,1990.89
pads on no net: 1.1 ?.1 OLED.MH1 OLED.MH2 OLED.MH3 OLED.MH4 S?.3 S?.4 S?.5 S?.6 TB?.
copper on no net: | length 12605.6
  Bottom Layer w15: 18,8 18,2878 ; 19,2879 3249,2879 3249,9
  Bottom Layer w15.75: 18,8 3249,8
  Bottom Layer w20: 521.57,547 590.43,547 574.43,563 ; 556,547 556,570 ; 1220,1413.59 1262,1413.59 ; 2151.94,1652.06 2235.94,1652.06 ; 2175,1646 2179.28,1646 ; 2181,1637 2183.14,1639.14 2208,1639.14 2220.91,1652.06 2235.94,1652.06 ; 2194.11,1622 2194.11,1644.08 ; 2217,1652 2236,1652 2235.94,1652.06 ; 2551,2012.89 2608.53,2012.89

## Polygon pours and split planes (outlines as drawn)
GND on Bottom Layer "GND" (solid, pour order 10): 18,2878 19,2879 3249,2879 3249,8 18,8

## Other copper
Bottom Layer:
  text "2019to2020" at 2084,2737 h80

## Silkscreen, mask and mechanical layers (free items; w line width, h text height)
Top Overlay:
  lines w15.75: 18,8 18,2879 3249,2879 3249,8 18,8
  text "MINSYS_ATMEGA328" at 1082,2689 h80
  text "SCL" at 747,2522 h60 r90
  text "SDA" at 844,2522 h60 r90
  text "VCC" at 945,2522 h60 r90
  text "GND" at 1047,2522 h60 r90
  text "GND" at 29,2418.89 h60
  text "VCC" at 29,2313.89 h60
  text "D1" at 1604,2283.89 h60 r90
  text "D0" at 1509,2278.89 h60 r90
  text "D2" at 1704,2278.89 h60 r90
  text "D3" at 1804,2278.89 h60 r90
  text "D4" at 1904,2278.89 h60 r90
  text "D5" at 2004,2278.89 h60 r90
  text "D6" at 2104,2278.89 h60 r90
  text "D7" at 2209,2278.89 h60 r90
  text "D8" at 2309,2278.89 h60 r90
  text "D9" at 2409,2278.89 h60 r90
  text "D11" at 2609,2241.89 h60 r90
  text "D10" at 2509,2233.89 h60 r90
  text "D12" at 2709,2233.89 h60 r90
  text "D13" at 2809,2233.89 h60 r90
  text "VCC" at 2914,2233.89 h60 r90
  text "GND" at 3004,2233.89 h60 r90
  text "A0" at 84,2218.89 h60
  text "A1" at 84,2118.89 h60
  text "A2" at 84,2018.89 h60
  text "A3" at 84,1918.89 h60
  text "A4" at 84,1813.89 h60
  text "A5" at 84,1718.89 h60
  text "RX" at 2804,1231 h55
  text "TX" at 2799,1131 h55
  text "RST" at 2757.5,1031 h55
  text "E" at 2369,1002 h60
  text "I" at 2578,1002 h60
  text "GND" at 2754,931 h55
  text "5V" at 2794,831 h55
  text "NOVAL ANUGRAH.K / 1103181039" at 301,655.63 h60 r90
  text "+" at 2362.27,359.71 h70
  text "-" at 2562.34,359 h70

## Text inside footprints (layer, text, board x,y; h text height)
ISP: Top Overlay "1" at 2929,1793.89 h50 r270; Top Overlay "2" at 3029,1813.89 h50 r270; Top Overlay "5" at 2929,1453.89 h50 r270; Top Overlay "6" at 3029,1453.89 h50 r270
JP2: Top Overlay "3" at 1734,1167 h50; Top Overlay "2" at 1474,1267 h50; Top Overlay "1" at 1494,1167 h50; Top Overlay "4" at 1734,1267 h50
OLED: Mechanical 7 "GND" at 1472,998 h62; Mechanical 7 "VCC" at 1572,948 h62; Mechanical 7 "SCL" at 1672,998 h62; Mechanical 7 "SDA" at 1772,948 h62
VR1: Mechanical 7 "1" at 658,1553 h77.5; Mechanical 7 "3" at 343,1553 h77.5; Mechanical 3 "3" at 443,1453 h77.5